# Altium PCB HARSH_Payload.PcbDoc (part 2 of 2)
Units mil, origin at the board's own origin, x right, y up, seen from the top; angles counter-clockwise.
Board outline 2500 x 1712.6 mil, 6 copper layers (Top-Outer-Layer (GND), Top-Mid-Layer Signal, Inner-Layer (GND), Inner-Layer (VCC), Bottom-Mid-Layer Signal, Bottom-Outer-Layer (GND)), stack 62.896 mil thick; 77 components, 30 nets, 807 pads, 301 vias.
Unrouted connection lines stored in the file: 3.
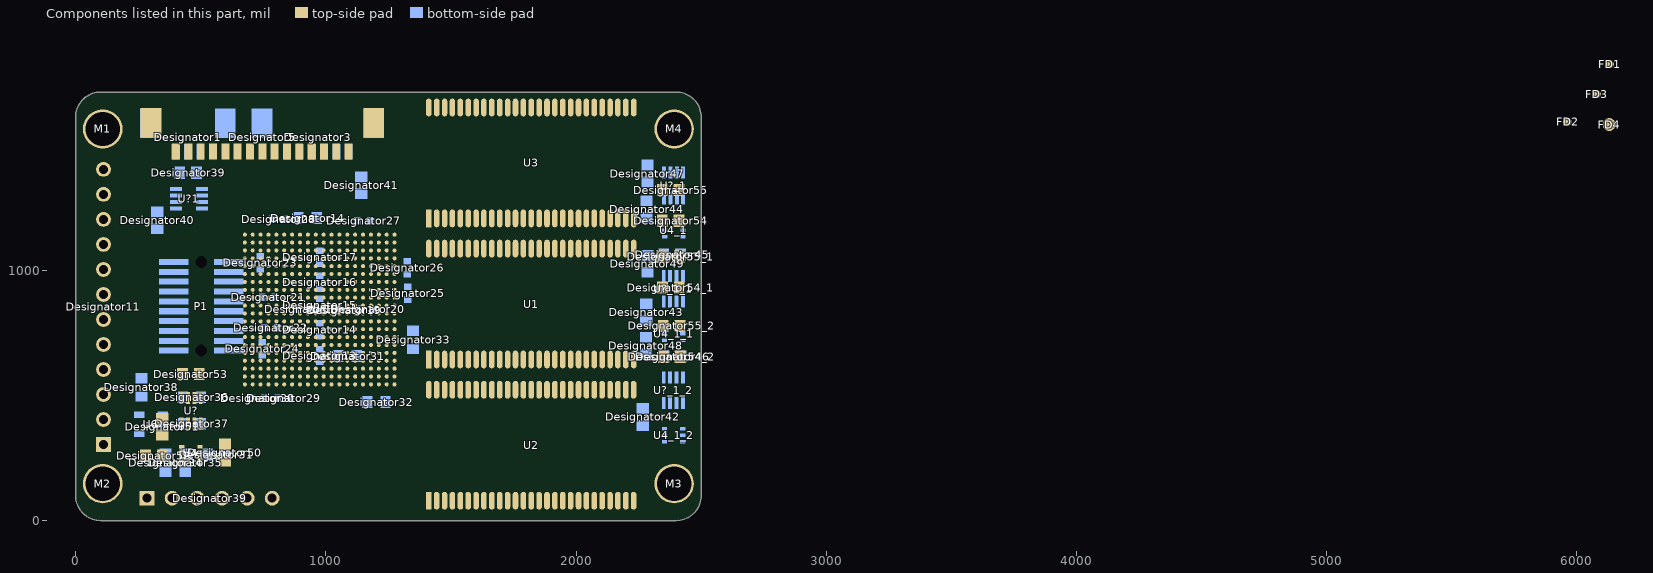
[diagram p6: the components of this part, seen from the top]

## Via types
v1: diameter 15, hole 8, Top-Outer-Layer (GND) to Bottom-Outer-Layer (GND), 301 vias

## Nets (pads, with @x,y where several pads share a name; then routed paths per layer and width w, separated by ;. In a path a pad name is that pad's centre, name@x,y a point inside that pad or via, vN(x,y) a via of type N, cw(c..) or ccw(c..) an arc to the next point about the centre after c; other vN are vias at no path point) (continued)
copper on no net: | length 11704.6
  Top-Outer-Layer (GND) w4: v1(660.43,527.56) 676.18,543.31 ; v1(660.43,559.06) 676.18,574.8 ; 660.43,590.55 676.18,606.3 ; 660.43,622.05 676.18,637.8 ; 660.43,653.54 676.18,669.29 ; 660.43,685.04 676.18,700.79 ; 660.43,716.54 676.18,732.28 ; 660.43,748.03 676.18,763.78 ; 660.43,779.53 676.18,795.28 ; 660.43,811.02 676.18,826.77 ; 660.43,874.02 676.18,858.27 ; 660.43,905.51 676.18,889.76 ; 660.43,937.01 676.18,921.26 ; 660.43,968.5 676.18,952.76 ; 660.43,1000 676.18,984.25 ; 660.43,1031.5 676.18,1015.75 ; 660.43,1062.99 676.18,1047.24 ; v1(660.43,1094.49) 676.18,1078.74 ; v1(660.43,1125.98) 676.18,1110.24 ; v1(660.43,1157.48) 676.18,1141.73 ; v1(691.93,527.56) 707.68,543.31 ; v1(691.93,559.06) 707.68,574.8 ; 691.93,590.55 707.68,606.3 ; 691.93,622.05 707.68,637.8 ; 691.93,653.54 707.68,669.29 ; 691.93,685.04 707.68,700.79 ; 691.93,716.54 707.68,732.28 ; 691.93,748.03 707.68,763.78 ; 691.93,779.53 707.68,795.28 ; 691.93,811.02 707.68,826.77 ; 691.93,874.02 707.68,858.27 ; 691.93,905.51 707.68,889.76 ; 691.93,937.01 707.68,921.26 ; 691.93,968.5 707.68,952.76 ; 691.93,1000 707.68,984.25 ; 691.93,1031.5 707.68,1015.75 ; 691.93,1062.99 707.68,1047.24 ; v1(691.93,1094.49) 707.68,1078.74 ; v1(691.93,1125.98) 707.68,1110.24 ; v1(691.93,1157.48) 707.68,1141.73 ; v1(723.43,527.56) 739.17,543.31 ; v1(723.43,559.06) 739.17,574.8 ; 723.43,590.55 739.17,606.3 ; 723.43,622.05 739.17,637.8 ; 723.43,653.54 739.17,669.29 ; 723.43,685.04 739.17,700.79 ; 723.43,716.54 739.17,732.28 ; 723.43,748.03 739.17,763.78 ; 723.43,779.53 739.17,795.28 ; 723.43,811.02 739.17,826.77 ; 723.43,874.02 739.17,858.27 ; 723.43,905.51 739.17,889.76 ; 723.43,937.01 739.17,921.26 ; 723.43,968.5 739.17,952.76 ; 723.43,1000 739.17,984.25 ; 723.43,1031.5 739.17,1015.75 ; 723.43,1062.99 739.17,1047.24 ; v1(723.43,1094.49) 739.17,1078.74 ; v1(723.43,1125.98) 739.17,1110.24 ; v1(723.43,1157.48) 739.17,1141.73 ; v1(754.92,527.56) 770.67,543.31 ; v1(754.92,559.06) 770.67,574.8 ; 754.92,590.55 770.67,606.3 ; 754.92,622.05 770.67,637.8 ; 754.92,653.54 770.67,669.29 ; 754.92,685.04 770.67,700.79 ; 754.92,716.54 770.67,732.28 ; 754.92,748.03 770.67,763.78 ; 754.92,779.53 770.67,795.28 ; 754.92,811.02 770.67,826.77 ; 754.92,874.02 770.67,858.27 ; 754.92,905.51 770.67,889.76 ; 754.92,937.01 770.67,921.26 ; 754.92,968.5 770.67,952.76 ; 754.92,1000 770.67,984.25 ; 754.92,1031.5 770.67,1015.75 ; 754.92,1062.99 770.67,1047.24 ; v1(754.92,1094.49) 770.67,1078.74 ; v1(754.92,1125.98) 770.67,1110.24 ; v1(754.92,1157.48) 770.67,1141.73 ; v1(786.42,527.56) 802.17,543.31 ; v1(786.42,559.06) 802.17,574.8 ; v1(786.42,590.55) 802.17,606.3 ; v1(786.42,622.05) 802.17,637.8 ; v1(786.42,653.54) 802.17,669.29 ; v1(786.42,685.04) 802.17,700.79 ; v1(786.42,716.54) 802.17,732.28 ; 786.42,748.03 802.17,763.78 ; 786.42,779.53 802.17,795.28 ; 786.42,811.02 802.17,826.77 ; 786.42,874.02 802.17,858.27 ; 786.42,905.51 802.17,889.76 ; v1(786.42,937.01) 802.17,921.26 ; v1(786.42,968.5) 802.17,952.76 ; v1(786.42,1000) 802.17,984.25 ; v1(786.42,1031.5) 802.17,1015.75 ; v1(786.42,1062.99) 802.17,1047.24 ; v1(786.42,1094.49) 802.17,1078.74 ; v1(786.42,1125.98) 802.17,1110.24 ; v1(786.42,1157.48) 802.17,1141.73 ; v1(817.91,527.56) 833.66,543.31 ; v1(817.91,559.06) 833.66,574.8 ; v1(817.91,590.55) 833.66,606.3 ; v1(817.91,622.05) 833.66,637.8 ; v1(817.91,653.54) 833.66,669.29 ; v1(817.91,685.04) 833.66,700.79 ; v1(817.91,716.54) 833.66,732.28 ; 817.91,748.03 833.66,763.78 ; 817.91,779.53 833.66,795.28 ; 817.91,811.02 833.66,826.77 ; 817.91,874.02 833.66,858.27 ; 817.91,905.51 833.66,889.76 ; v1(817.91,937.01) 833.66,921.26 ; v1(817.91,968.5) 833.66,952.76 ; v1(817.91,1000) 833.66,984.25 ; v1(817.91,1031.5) 833.66,1015.75 ; v1(817.91,1062.99) 833.66,1047.24 ; v1(817.91,1094.49) 833.66,1078.74 ; v1(817.91,1125.98) 833.66,1110.24 ; v1(817.91,1157.48) 833.66,1141.73 ; v1(849.41,527.56) 865.16,543.31 ; v1(849.41,559.06) 865.16,574.8 ; v1(849.41,590.55) 865.16,606.3 ; v1(849.41,622.05) 865.16,637.8 ; v1(849.41,653.54) 865.16,669.29 ; v1(849.41,685.04) 865.16,700.79 ; v1(849.41,716.54) 865.16,732.28 ; v1(849.41,748.03) 865.16,763.78 ; v1(849.41,779.53) 865.16,795.28 ; v1(849.41,811.02) 865.16,826.77 ; v1(849.41,874.02) 865.16,858.27 ; v1(849.41,905.51) 865.16,889.76 ; v1(849.41,937.01) 865.16,921.26 ; v1(849.41,968.5) 865.16,952.76 ; v1(849.41,1000) 865.16,984.25 ; v1(849.41,1031.5) 865.16,1015.75 ; v1(849.41,1062.99) 865.16,1047.24 ; v1(849.41,1094.49) 865.16,1078.74 ; v1(849.41,1125.98) 865.16,1110.24 ; v1(849.41,1157.48) 865.16,1141.73 ; v1(880.91,527.56) 896.65,543.31 ; v1(880.91,559.06) 896.65,574.8 ; v1(880.91,590.55) 896.65,606.3 ; v1(880.91,622.05) 896.65,637.8 ; v1(880.91,653.54) 896.65,669.29 ; v1(880.91,685.04) 896.65,700.79 ; v1(880.91,716.54) 896.65,732.28 ; v1(880.91,748.03) 896.65,763.78 ; v1(880.91,779.53) 896.65,795.28 ; v1(880.91,811.02) 896.65,826.77 ; v1(880.91,874.02) 896.65,858.27 ; v1(880.91,905.51) 896.65,889.76 ; v1(880.91,937.01) 896.65,921.26 ; v1(880.91,968.5) 896.65,952.76 ; v1(880.91,1000) 896.65,984.25 ; v1(880.91,1031.5) 896.65,1015.75 ; v1(880.91,1062.99) 896.65,1047.24 ; v1(880.91,1094.49) 896.65,1078.74 ; v1(880.91,1125.98) 896.65,1110.24 ; v1(880.91,1157.48) 896.65,1141.73 ; v1(912.4,527.56) 928.15,543.31 ; v1(912.4,559.06) 928.15,574.8 ; v1(912.4,590.55) 928.15,606.3 ; v1(912.4,622.05) 928.15,637.8 ; v1(912.4,653.54) 928.15,669.29 ; v1(912.4,685.04) 928.15,700.79 ; v1(912.4,716.54) 928.15,732.28 ; v1(912.4,748.03) 928.15,763.78 ; v1(912.4,779.53) 928.15,795.28 ; v1(912.4,811.02) 928.15,826.77 ; v1(912.4,874.02) 928.15,858.27 ; v1(912.4,905.51) 928.15,889.76 ; v1(912.4,937.01) 928.15,921.26 ; v1(912.4,968.5) 928.15,952.76 ; v1(912.4,1000) 928.15,984.25 ; v1(912.4,1031.5) 928.15,1015.75 ; v1(912.4,1062.99) 928.15,1047.24 ; v1(912.4,1094.49) 928.15,1078.74 ; v1(912.4,1125.98) 928.15,1110.24 ; v1(912.4,1157.48) 928.15,1141.73 ; v1(943.9,527.56) 959.65,543.31 ; v1(943.9,559.06) 959.65,574.8 ; v1(943.9,590.55) 959.65,606.3 ; v1(943.9,622.05) 959.65,637.8 ; v1(943.9,653.54) 959.65,669.29 ; v1(943.9,685.04) 959.65,700.79 ; v1(943.9,716.54) 959.65,732.28 ; v1(943.9,748.03) 959.65,763.78 ; v1(943.9,779.53) 959.65,795.28 ; v1(943.9,811.02) 959.65,826.77 ; v1(943.9,874.02) 959.65,858.27 ; v1(943.9,905.51) 959.65,889.76 ; v1(943.9,937.01) 959.65,921.26 ; v1(943.9,968.5) 959.65,952.76 ; v1(943.9,1000) 959.65,984.25 ; v1(943.9,1031.5) 959.65,1015.75 ; v1(943.9,1062.99) 959.65,1047.24 ; v1(943.9,1094.49) 959.65,1078.74 ; v1(943.9,1125.98) 959.65,1110.24 ; v1(943.9,1157.48) 959.65,1141.73 ; 975.39,510.24 975.39,590.55 991.14,606.3 ; 991.14,510.24 991.14,543.31 ; 991.14,574.8 1006.89,559.06 1006.89,510.24 ; 991.14,732.28 v1(1006.89,716.54) ; 991.14,763.78 v1(1006.89,748.03) ; 991.14,795.28 v1(1006.89,779.53) ; 991.14,826.77 v1(1006.89,811.02) ; 991.14,858.27 v1(1006.89,874.02) ; 991.14,889.76 v1(1006.89,905.51) ; 991.14,921.26 v1(1006.89,937.01) ; 991.14,952.76 v1(1006.89,968.5) ; 991.14,984.25 v1(1006.89,1000) ; 991.14,1015.75 v1(1006.89,1031.5) ; 991.14,1047.24 v1(1006.89,1062.99) ; 991.14,1078.74 v1(1006.89,1094.49) ; 991.14,1110.24 v1(1006.89,1125.98) ; 991.14,1141.73 v1(1006.89,1157.48) ; 1022.64,510.24 1022.64,543.31 ; 1022.64,574.8 1038.39,559.06 1038.39,510.24 ; 1022.64,732.28 v1(1038.39,716.54) ; 1022.64,763.78 v1(1038.39,748.03) ; 1022.64,795.28 v1(1038.39,779.53) ; 1022.64,826.77 v1(1038.39,811.02) ; 1022.64,858.27 v1(1038.39,874.02) ; 1022.64,889.76 v1(1038.39,905.51) ; 1022.64,921.26 v1(1038.39,937.01) ; 1022.64,952.76 v1(1038.39,968.5) ; 1022.64,984.25 v1(1038.39,1000) ; 1022.64,1015.75 v1(1038.39,1031.5) ; 1022.64,1047.24 v1(1038.39,1062.99) ; 1022.64,1078.74 v1(1038.39,1094.49) ; 1022.64,1110.24 v1(1038.39,1125.98) ; 1022.64,1141.73 v1(1038.39,1157.48) ; 1054.13,510.24 1054.13,543.31 ; 1054.13,574.8 1069.88,559.06 1069.88,510.24 ; 1054.13,732.28 v1(1069.88,716.54) ; 1054.13,763.78 v1(1069.88,748.03) ; 1054.13,795.28 v1(1069.88,779.53) ; 1054.13,826.77 v1(1069.88,811.02) ; 1054.13,858.27 v1(1069.88,874.02) ; 1054.13,889.76 v1(1069.88,905.51) ; 1054.13,921.26 v1(1069.88,937.01) ; 1054.13,952.76 v1(1069.88,968.5) ; 1054.13,984.25 v1(1069.88,1000) ; 1054.13,1015.75 v1(1069.88,1031.5) ; 1054.13,1047.24 v1(1069.88,1062.99) ; 1054.13,1078.74 v1(1069.88,1094.49) ; 1054.13,1110.24 v1(1069.88,1125.98) ; 1054.13,1141.73 v1(1069.88,1157.48) ; 1085.63,510.24 1085.63,543.31 ; 1085.63,574.8 1101.38,559.06 1101.38,510.24 ; 1085.63,732.28 v1(1101.38,716.54) ; 1085.63,763.78 v1(1101.38,748.03) ; 1085.63,795.28 v1(1101.38,779.53) ; 1085.63,826.77 v1(1101.38,811.02) ; 1085.63,858.27 v1(1101.38,874.02) ; 1085.63,889.76 v1(1101.38,905.51) ; 1085.63,921.26 v1(1101.38,937.01) ; 1085.63,952.76 v1(1101.38,968.5) ; 1085.63,984.25 v1(1101.38,1000) ; 1085.63,1015.75 v1(1101.38,1031.5) ; 1085.63,1047.24 v1(1101.38,1062.99) ; 1085.63,1078.74 v1(1101.38,1094.49) ; 1085.63,1110.24 v1(1101.38,1125.98) ; 1085.63,1141.73 v1(1101.38,1157.48) ; 1117.13,510.24 1117.13,543.31 ; 1117.13,574.8 1132.87,559.06 1132.87,510.24 ; 1117.13,732.28 v1(1132.87,716.54) ; 1117.13,763.78 v1(1132.87,748.03) ; 1117.13,795.28 v1(1132.87,779.53) ; 1117.13,826.77 v1(1132.87,811.02) ; 1117.13,858.27 v1(1132.87,874.02) ; 1117.13,889.76 v1(1132.87,905.51) ; 1117.13,921.26 v1(1132.87,937.01) ; 1117.13,952.76 v1(1132.87,968.5) ; 1117.13,984.25 v1(1132.87,1000) ; 1117.13,1015.75 v1(1132.87,1031.5) ; 1117.13,1047.24 v1(1132.87,1062.99) ; 1117.13,1078.74 v1(1132.87,1094.49) ; 1117.13,1110.24 v1(1132.87,1125.98) ; 1117.13,1141.73 v1(1132.87,1157.48) ; 1148.62,543.31 v1(1164.37,527.56) ; 1148.62,574.8 v1(1164.37,559.06) ; 1148.62,606.3 v1(1164.37,590.55) ; 1148.62,637.8 v1(1164.37,622.05) ; 1148.62,669.29 v1(1164.37,653.54) ; 1148.62,700.79 v1(1164.37,685.04) ; 1148.62,732.28 v1(1164.37,716.54) ; 1148.62,763.78 v1(1164.37,748.03) ; 1148.62,795.28 v1(1164.37,779.53) ; 1148.62,826.77 v1(1164.37,811.02) ; 1148.62,858.27 v1(1164.37,874.02) ; 1148.62,889.76 v1(1164.37,905.51) ; 1148.62,921.26 v1(1164.37,937.01) ; 1148.62,952.76 v1(1164.37,968.5) ; 1148.62,984.25 v1(1164.37,1000) ; 1148.62,1015.75 v1(1164.37,1031.5) ; 1148.62,1047.24 v1(1164.37,1062.99) ; 1148.62,1078.74 v1(1164.37,1094.49) ; 1148.62,1110.24 v1(1164.37,1125.98) ; 1148.62,1141.73 v1(1164.37,1157.48) ; 1180.12,543.31 v1(1195.87,527.56) ; 1180.12,574.8 v1(1195.87,559.06) ; 1180.12,606.3 v1(1195.87,590.55) ; 1180.12,637.8 v1(1195.87,622.05) ; 1180.12,669.29 v1(1195.87,653.54) ; 1180.12,700.79 v1(1195.87,685.04) ; 1180.12,732.28 v1(1195.87,716.54) ; 1180.12,763.78 v1(1195.87,748.03) ; 1180.12,795.28 v1(1195.87,779.53) ; 1180.12,826.77 v1(1195.87,811.02) ; 1180.12,858.27 v1(1195.87,874.02) ; 1180.12,889.76 v1(1195.87,905.51) ; 1180.12,921.26 v1(1195.87,937.01) ; 1180.12,952.76 v1(1195.87,968.5) ; 1180.12,984.25 v1(1195.87,1000) ; 1180.12,1015.75 v1(1195.87,1031.5) ; 1180.12,1047.24 v1(1195.87,1062.99) ; 1180.12,1078.74 v1(1195.87,1094.49) ; 1180.12,1110.24 v1(1195.87,1125.98) ; 1180.12,1141.73 v1(1195.87,1157.48) ; 1211.61,543.31 v1(1227.36,527.56) ; 1211.61,574.8 v1(1227.36,559.06) ; 1211.61,606.3 v1(1227.36,590.55) ; 1211.61,637.8 v1(1227.36,622.05) ; 1211.61,669.29 v1(1227.36,653.54) ; 1211.61,700.79 v1(1227.36,685.04) ; 1211.61,732.28 v1(1227.36,716.54) ; 1211.61,763.78 v1(1227.36,748.03) ; 1211.61,795.28 v1(1227.36,779.53) ; 1211.61,826.77 v1(1227.36,811.02) ; 1211.61,858.27 v1(1227.36,874.02) ; 1211.61,889.76 v1(1227.36,905.51) ; 1211.61,921.26 v1(1227.36,937.01) ; 1211.61,952.76 v1(1227.36,968.5) ; 1211.61,984.25 v1(1227.36,1000) ; 1211.61,1015.75 v1(1227.36,1031.5) ; 1211.61,1047.24 v1(1227.36,1062.99) ; 1211.61,1078.74 v1(1227.36,1094.49) ; 1211.61,1110.24 v1(1227.36,1125.98) ; 1211.61,1141.73 v1(1227.36,1157.48) ; 1243.11,543.31 v1(1258.86,527.56) ; 1243.11,574.8 v1(1258.86,559.06) ; 1243.11,606.3 v1(1258.86,590.55) ; 1243.11,637.8 v1(1258.86,622.05) ; 1243.11,669.29 v1(1258.86,653.54) ; 1243.11,700.79 v1(1258.86,685.04) ; 1243.11,732.28 v1(1258.86,716.54) ; 1243.11,763.78 v1(1258.86,748.03) ; 1243.11,795.28 v1(1258.86,779.53) ; 1243.11,826.77 v1(1258.86,811.02) ; 1243.11,858.27 v1(1258.86,874.02) ; 1243.11,889.76 v1(1258.86,905.51) ; 1243.11,921.26 v1(1258.86,937.01) ; 1243.11,952.76 v1(1258.86,968.5) ; 1243.11,984.25 v1(1258.86,1000) ; 1243.11,1015.75 v1(1258.86,1031.5) ; 1243.11,1047.24 v1(1258.86,1062.99) ; 1243.11,1078.74 v1(1258.86,1094.49) ; 1243.11,1110.24 v1(1258.86,1125.98) ; 1243.11,1141.73 v1(1258.86,1157.48) ; 1274.61,543.31 v1(1290.35,527.56) ; 1274.61,574.8 v1(1290.35,559.06) ; 1274.61,606.3 v1(1290.35,590.55) ; 1274.61,637.8 v1(1290.35,622.05) ; 1274.61,669.29 v1(1290.35,653.54) ; 1274.61,700.79 v1(1290.35,685.04) ; 1274.61,732.28 v1(1290.35,716.54) ; 1274.61,763.78 v1(1290.35,748.03) ; 1274.61,795.28 v1(1290.35,779.53) ; 1274.61,826.77 v1(1290.35,811.02) ; 1274.61,858.27 v1(1290.35,874.02) ; 1274.61,889.76 v1(1290.35,905.51) ; 1274.61,921.26 v1(1290.35,937.01) ; 1274.61,952.76 v1(1290.35,968.5) ; 1274.61,984.25 v1(1290.35,1000) ; 1274.61,1015.75 v1(1290.35,1031.5) ; 1274.61,1047.24 v1(1290.35,1062.99) ; 1274.61,1078.74 v1(1290.35,1094.49) ; 1274.61,1110.24 v1(1290.35,1125.98) ; 1274.61,1141.73 v1(1290.35,1157.48)
  Top-Outer-Layer (GND) w7.87: 966.54,57.09 973.43,57.09 ; 966.54,89.57 973.43,96.46 973.43,57.09 ; 980.31,57.09 973.43,57.09 ; 942.91,45.28 1001.97,45.28 1001.97,108.27 942.91,108.27 942.91,45.28
  Top-Mid-Layer Signal w4: v1(880.91,590.55) 880.91,578.15 894.41,564.65 894.41,518.98 931.1,482.28 978.35,482.28 ; v1(912.4,527.56) 934.06,505.91 989.17,505.91 1015.75,479.33 ; v1(912.4,559.06) 926.18,545.28 965.55,545.28 1017.72,493.11 ; v1(912.4,590.55) 929.13,573.82 956.69,573.82 1030.51,500 ; v1(912.4,653.54) 926.18,639.76 972.44,639.76 1080.71,531.5 ; v1(943.9,590.55) 961.61,590.55 1049.21,502.95 ; v1(943.9,622.05) 972.44,622.05 1067.91,526.57 ; v1(943.9,653.54) 971.46,653.54 1090.55,534.45 ; v1(1006.89,685.04) 1006.89,643.7 1095.47,555.12
  Top-Mid-Layer Signal w7.87: 1019.69,89.57 1025.59,95.47 1038.39,95.47 1043.31,90.55 1043.31,82.68 1019.69,59.06 1044.29,59.06 ; 1001.97,45.28 1001.97,108.27 1061.02,108.27 1061.02,45.28 1001.97,45.28
  Bottom-Mid-Layer Signal w7.87: 1197.83,63.98 1203.74,58.07 1216.54,58.07 1222.44,63.98 1222.44,75.79 1215.55,82.68 1206.69,82.68 1197.83,73.82 1197.83,94.49 1222.44,94.49 ; 1179.13,45.28 1238.19,45.28 1238.19,108.27 1179.13,108.27 1179.13,45.28
  Bottom-Outer-Layer (GND) w7.87: 1254.92,77.76 1274.61,77.76 1280.51,71.85 1280.51,63.98 1274.61,58.07 1262.8,58.07 1254.92,65.94 1254.92,83.66 1266.73,95.47 1280.51,95.47 ; 1238.19,45.28 1297.24,45.28 1297.24,108.27 1238.19,108.27 1238.19,45.28

## Polygon pours and split planes (outlines as drawn)
no net on Mechanical 1 (solid): 118.11,1660.43
GND on Top-Outer-Layer (GND) "Top Layer-GND" (solid, remove dead copper, pour order 14): 335.04,3657.32 cw(c439.37,3657.32) 439.37,3761.65 2729.72,3761.65 cw(c2729.72,3656.34) 2835.04,3656.34 2835.04,2153.39 cw(c2730.71,2153.38) 2730.71,2049.05 439.37,2049.05 cw(c439.37,2153.39) 335.04,2153.39
no net on Top-Outer-Layer (GND) "Top Layer-No Net" (solid, pour order 10): -262.8,843.5
GND on Bottom-Outer-Layer (GND) "Bottom Layer-GND" (solid, remove dead copper, pour order 16): 3307.34,3286.69 cw(c3417.34,3286.69) 3417.34,3396.69 5697.34,3396.69 cw(c5697.34,3286.69) 5807.34,3286.69 5807.34,1794.1 cw(c5697.34,1794.1) 5697.34,1684.1 3417.34,1684.1 cw(c3417.34,1794.1) 3307.34,1794.1
no net on Inner-Layer (GND) (split plane): 1116.06,49.29 1065.04,49.29 1065.04,104.25 1116.06,104.25
no net on Inner-Layer (GND) (split plane): 2407.84,1691.23 2415.61,1690.07 2423.22,1688.17 2430.61,1685.52 2437.71,1682.16 2444.44,1678.13 2450.75,1673.45 2456.57,1668.18 2461.84,1662.36 2466.51,1656.06 2470.55,1649.32 2473.91,1642.23 2476.55,1634.84 2478.46,1627.22 2479.61,1619.46 2479.97,1612.24 2479.9,1611.61 2479.9,1601.38 2479.9,109.25 2479.9,99.02 2479.97,98.38 2479.61,91.17 2478.46,83.41 2476.55,75.79 2473.91,68.4 2470.55,61.31 2466.51,54.57 2461.84,48.27 2456.57,42.45 2450.75,37.18 2444.44,32.5 2437.71,28.47 2430.61,25.11 2423.22,22.46 2415.61,20.56 2407.84,19.4 2400.63,19.05 2400,19.11 100,19.11 99.37,19.05 92.16,19.4 84.39,20.56 76.78,22.46 69.39,25.11 62.29,28.47 55.56,32.5 49.25,37.18 43.43,42.45 38.16,48.27 33.49,54.57 29.45,61.31 26.09,68.4 23.45,75.79 21.54,83.41 20.39,91.17 20.03,98.39 20.1,99.02 20.1,109.25 20.1,1607.28 20.1,1611.61 20.03,1612.25 20.39,1619.46 21.54,1627.22 23.45,1634.84 26.09,1642.23 29.45,1649.32 33.49,1656.06 38.16,1662.36 43.43,1668.18 49.25,1673.45 55.56,1678.13 62.29,1682.16 69.39,1685.52 76.78,1688.17 84.39,1690.07 92.16,1691.23 99.37,1691.58 100,1691.52 104.33,1691.52 2389.76,1691.52 2400,1691.52 2400.63,1691.58
no net on Inner-Layer (VCC) (split plane): 1151.5,80.79 1145.52,80.79 1151.5,86.77
no net on Inner-Layer (VCC) (split plane): 1175.12,49.29 1124.09,49.29 1124.09,104.25 1175.12,104.25
no net on Inner-Layer (VCC) (split plane): 2407.84,1691.23 2415.61,1690.07 2423.22,1688.17 2430.61,1685.52 2437.71,1682.16 2444.44,1678.13 2450.75,1673.45 2456.57,1668.18 2461.84,1662.36 2466.51,1656.06 2470.55,1649.32 2473.91,1642.23 2476.55,1634.84 2478.46,1627.22 2479.61,1619.46 2479.97,1612.24 2479.9,1611.61 2479.9,1601.38 2479.9,109.25 2479.9,99.02 2479.97,98.38 2479.61,91.17 2478.46,83.41 2476.55,75.79 2473.91,68.4 2470.55,61.31 2466.51,54.57 2461.84,48.27 2456.57,42.45 2450.75,37.18 2444.44,32.5 2437.71,28.47 2430.61,25.11 2423.22,22.46 2415.61,20.56 2407.84,19.4 2400.63,19.05 2400,19.11 100,19.11 99.37,19.05 92.16,19.4 84.39,20.56 76.78,22.46 69.39,25.11 62.29,28.47 55.56,32.5 49.25,37.18 43.43,42.45 38.16,48.27 33.49,54.57 29.45,61.31 26.09,68.4 23.45,75.79 21.54,83.41 20.39,91.17 20.03,98.39 20.1,99.02 20.1,109.25 20.1,1607.28 20.1,1611.61 20.03,1612.25 20.39,1619.46 21.54,1627.22 23.45,1634.84 26.09,1642.23 29.45,1649.32 33.49,1656.06 38.16,1662.36 43.43,1668.18 49.25,1673.45 55.56,1678.13 62.29,1682.16 69.39,1685.52 76.78,1688.17 84.39,1690.07 92.16,1691.23 99.37,1691.58 100,1691.52 104.33,1691.52 2389.76,1691.52 2400,1691.52 2400.63,1691.58

## Keep-outs
Keep-Out Layer:
  lines w7.87: 942.91,45.28 1297.24,45.28 1297.24,108.27 942.91,108.27 942.91,45.28
  lines w10: 0,99.02 ccw(c100,99.02) 100,-0.98 2400,-0.98 ccw(c2400,99.02) 2500,99.02 2500,1611.61 ccw(c2400,1611.61) 2400,1711.61 100,1711.61 ccw(c100,1611.61) 0,1611.61 0,1515.75 0,99.02
  lines w19.68: -4.92,243.11 -5.91,103.35 ccw(c99.7,99.7) 96.06,-5.91 203.74,-5.91 ; -4.92,1468.5 -4.92,1615.55 cw(c100.69,1611.91) 104.33,1717.52 205.7,1716.81 ; 2293.31,1716.54 2403.94,1716.54 cw(c2400.3,1610.93) 2505.91,1607.28 2504.93,1468.5 ; 2298.24,-6.2 2395.67,-6.89 ccw(c2399.31,98.72) 2504.92,95.08 2504.92,245.08

## Other copper
Top-Outer-Layer (GND):
  region: 0,1711.61
  region: -3.94,1711.61
Inner-Layer (GND) (plane layer: these items are gaps in the copper):
  rectangle: 1120.08,40.35 1302.17,113.19
  rectangle: 937.99,40.35 1061.02,113.19
  lines w7.87: 1076.77,63.98 1083.66,57.09 1096.46,57.09 1103.35,63.98 1103.35,69.88 1096.46,76.77 ; 1076.77,89.57 1083.66,96.46 1096.46,96.46 1103.35,89.57 1103.35,83.66 1096.46,76.77 ; 1089.57,76.77 1096.46,76.77 ; 1296.26,37.4 942.91,37.4 cw(c942.91,45.28) 935.04,45.28 935.04,108.27 cw(c942.91,108.27) 942.91,116.14 1296.26,116.14 ; 1297.24,37.4 ccw(c1297.24,45.28) 1305.12,45.28 1305.12,108.27 ccw(c1297.24,108.27) 1297.24,116.14 ; 1061.02,45.28 1120.08,45.28 1120.08,108.27 1061.02,108.27 1061.02,45.28
Inner-Layer (VCC) (plane layer: these items are gaps in the copper):
  rectangle: 1179.13,38.39 1302.17,114.17
  rectangle: 937.01,37.4 1120.08,114.17
  lines w7.87: 1155.51,57.09 1155.51,96.46 1135.83,76.77 1162.4,76.77 ; 1296.26,37.4 942.91,37.4 cw(c942.91,45.28) 935.04,45.28 935.04,108.27 cw(c942.91,108.27) 942.91,116.14 1296.26,116.14 ; 1297.24,37.4 ccw(c1297.24,45.28) 1305.12,45.28 1305.12,108.27 ccw(c1297.24,108.27) 1297.24,116.14 ; 1120.08,45.28 1179.13,45.28 1179.13,108.27 1120.08,108.27 1120.08,45.28

## Silkscreen, mask and mechanical layers (free items; w line width, h text height)
Top Overlay:
  drawing of 1597 lines, arcs and shapes, not listed
  text "+Y" at 2981.3,188.93 h30
  text "+X" at 3126.97,45.23 h30
  text "+Z" at 2919.29,-3.98 h30
  text "HARSH PAYLOAD / DAUGHTER BOARD / ENGINEERING MODEL" at 3279.53,-23.62 h39.37
Top Solder:
  rectangle: 934.06,37.4 1305.12,116.14
  lines w7.87: 1296.26,37.4 942.91,37.4 cw(c942.91,45.28) 935.04,45.28 935.04,108.27 cw(c942.91,108.27) 942.91,116.14 1296.26,116.14 ; 1297.24,37.4 ccw(c1297.24,45.28) 1305.12,45.28 1305.12,108.27 ccw(c1297.24,108.27) 1297.24,116.14
Bottom Solder:
  rectangle: 934.06,37.4 1305.12,116.14
  lines w7.87: 935.04,45.28 ccw(c942.91,45.28) 942.91,37.4 1297.24,37.4 ccw(c1297.24,45.28) 1305.12,45.28 1305.12,108.27 ccw(c1297.24,108.27) 1297.24,116.14 942.91,116.14 ccw(c942.91,108.27) 935.04,108.27 935.04,45.28
Board Outline:
  lines w10: 0,99.02 ccw(c100,99.02) 100,-0.98 2400,-0.98 ccw(c2400,99.02) 2500,99.02 2500,1611.61 ccw(c2400,1611.61) 2400,1711.61 100,1711.61 ccw(c100,1611.61) 0,1611.61 0,1515.75 0,99.02
Sheet:
  lines w10: 1073.82,-990.16 6751.86,-990.16 6751.86,-198.34 1310.04,-198.34 1310.04,-990.16 -585.63,-990.16 -585.63,3570.36 6751.86,3570.36 6751.86,-986.61 ; 1312.99,-812.93 4749.02,-812.93 ; 1312.99,-625.43 6751.86,-625.43 ; 1314.96,-437.93 6747.62,-437.93 ; 2939.36,-987.2 2939.36,-437.93 ; 4751.86,-986.22 4751.86,-200.31 ; 4753.94,-434.56 4753.94,22.64 6742.13,22.64 ; 5441.82,-433.99 5441.82,-197.83
  text "HARSH_DB" at 5575.79,-128.94 h75.62
  text "VARIANT:" at 4832.68,-144.21 h95
  text "DATE:" at 5526.57,-359.25 h75.62
  text "1.0" at 5202.76,-362.2 h75.62
  text "30/04/2020" at 5948.82,-362.2 h75.62
  text "REV." at 4838.58,-371.57 h95
  text "TITLE: HARSH PAYLOAD" at 1392.72,-378.46 h100
  text "Silkscreen color: green" at 2988.19,-565.94 h75.62
  text "MATERIAL:" at 1386.4,-571.79 h75.62
  text "FR4" at 2048.9,-571.79 h75.62
  text "Project: FloripaSat-2" at 4829.72,-572.83 h75.62
  text "SpaceLab | UFSC" at 4797.24,-714.57 h57.09
  text "Board Tickness:" at 1373.61,-759.29 h75.62
  text "Layers: 06" at 2996.06,-759.84 h75.62
  text "1.6mm" at 2502.95,-763.78 h75.62
  text "SPACERAD Group | LIRMM" at 4803.15,-822.83 h55.12
  text "Drawing:" at 3005.91,-937.99 h75.62
  text "Andre M. P. Mattos" at 3604.33,-937.99 h68.12
  text "PCB Surface:" at 1366.14,-952.76 h75.62
  text "ENIG" at 2264.76,-957.68 h68.12
Drill Drawing:
  circle w10: c2764.41,922.49 r17.76
  lines w10: 2746.65,664.95 2782.18,664.95 2782.18,700.47 2746.65,700.47 2746.65,664.95 ; 2746.65,780.4 2782.18,780.4 2764.41,744.88 2746.65,780.4 ; 2746.65,833.68 2755.53,833.68 2764.41,824.8 2773.3,833.68 2782.18,833.68 2773.3,842.56 2782.18,851.45 2773.3,851.45 2764.41,860.33 2755.53,851.45 2746.65,851.45 2755.53,842.56 2746.65,833.68
  lines w15: 2713.33,640.97 7407.72,640.97 ; 2713.33,960.68 7407.72,960.68 ; 3021.82,561.04 3021.82,1040.61 ; 3345.46,561.04 3345.46,1040.61 ; 3967.4,561.04 3967.4,1040.61 ; 4251.9,561.04 4251.9,1040.61 ; 4657.85,561.04 4657.85,1040.61 ; 6201.32,561.04 6201.32,1040.61 ; 6530.57,561.04 6530.57,1040.61 ; 6942.92,561.04 6942.92,1040.61 ; 2713.33,561.04 7407.72,561.04 7407.72,1040.61 2713.33,1040.61 2713.33,561.04
  text "Symbol" at 2761.29,984.66 h38.37
  text "Count" at 3045.79,984.66 h38.37
  text "Hole Size" at 3369.43,984.66 h38.37
  text "Plated" at 3991.37,984.66 h38.37
  text "Hole Type" at 4275.88,984.66 h38.37
  text "Drill Layer Pair" at 4681.83,984.66 h38.37
  text "Via/Pad" at 6225.3,984.66 h38.37
  text "Pad Shape" at 6554.55,984.66 h38.37
  text "Template" at 6966.89,984.66 h38.37
  text "301" at 3045.79,904.73 h31.97
  text "0.203mm (8.00mil)" at 3369.43,904.73 h31.97
  text "PTH" at 3991.37,904.73 h31.97
  text "Round" at 4275.88,904.73 h31.97
  text "Top-Outer-Layer (GND) - Bottom-Outer-Layer (GND)" at 4681.83,904.73 h31.97
  text "Via" at 6225.3,904.73 h31.97
  text "Rounded" at 6554.55,904.73 h31.97
  text "v38h20" at 6966.89,904.73 h31.97
  text "12" at 3045.79,824.8 h31.97
  text "0.900mm (35.43mil)" at 3369.43,824.8 h31.97
  text "PTH" at 3991.37,824.8 h31.97
  text "Round" at 4275.88,824.8 h31.97
  text "Top-Outer-Layer (GND) - Bottom-Outer-Layer (GND)" at 4681.83,824.8 h31.97
  text "Pad" at 6225.3,824.8 h31.97
  text "(Mixed)" at 6554.55,824.8 h31.97
  text "(Mixed)" at 6966.89,824.8 h31.97
  text "2" at 3045.79,744.88 h31.97
  text "1.200mm (47.24mil)" at 3369.43,744.88 h31.97
  text "PTH" at 3991.37,744.88 h31.97
  text "Round" at 4275.88,744.88 h31.97
  text "Top-Outer-Layer (GND) - Bottom-Outer-Layer (GND)" at 4681.83,744.88 h31.97
  text "Pad" at 6225.3,744.88 h31.97
  text "Rounded" at 6554.55,744.88 h31.97
  text "c0h120" at 6966.89,744.88 h31.97
  text "4" at 3045.79,664.95 h31.97
  text "3.500mm (137.79mil)" at 3369.43,664.95 h31.97
  text "PTH" at 3991.37,664.95 h31.97
  text "Round" at 4275.88,664.95 h31.97
  text "Top-Outer-Layer (GND) - Bottom-Outer-Layer (GND)" at 4681.83,664.95 h31.97
  text "Pad" at 6225.3,664.95 h31.97
  text "Rounded" at 6554.55,664.95 h31.97
  text "c400h350m400" at 6966.89,664.95 h31.97
  text "319 Total" at 3045.79,585.02 h31.97

## Dimensions
0,0 to 0,1711.61 on Dimensions
0,0 to 2500,-0.98 on Dimensions

## Text inside footprints (layer, text, board x,y; h text height)
P1: Bottom Overlay "DVCC" at 287.4,667.32 h19.68; Bottom Overlay "ANT" at 277.56,706.69 h19.68; Bottom Overlay "BAT" at 277.56,747.05 h19.68; Bottom Overlay "CLK" at 277.56,863.19 h19.68; Bottom Overlay "MISO" at 285.76,904.53 h19.68; Bottom Overlay "MOSI" at 284.12,941.93 h19.68; Bottom Overlay "IC2C" at 785.43,998.03 h19.68; Bottom Overlay "ADC" at 777.23,901.25 h19.68; Bottom Overlay "GPIO" at 785.43,804.46 h19.68; Bottom Overlay "GND" at 777.23,707.68 h19.68; Bottom Overlay "CS" at 267.72,1005.91 h19.68; Bottom Overlay "GPIO" at 285.76,808.07 h19.68